# EAGLE board acq07 (EAGLE 9.6.2)
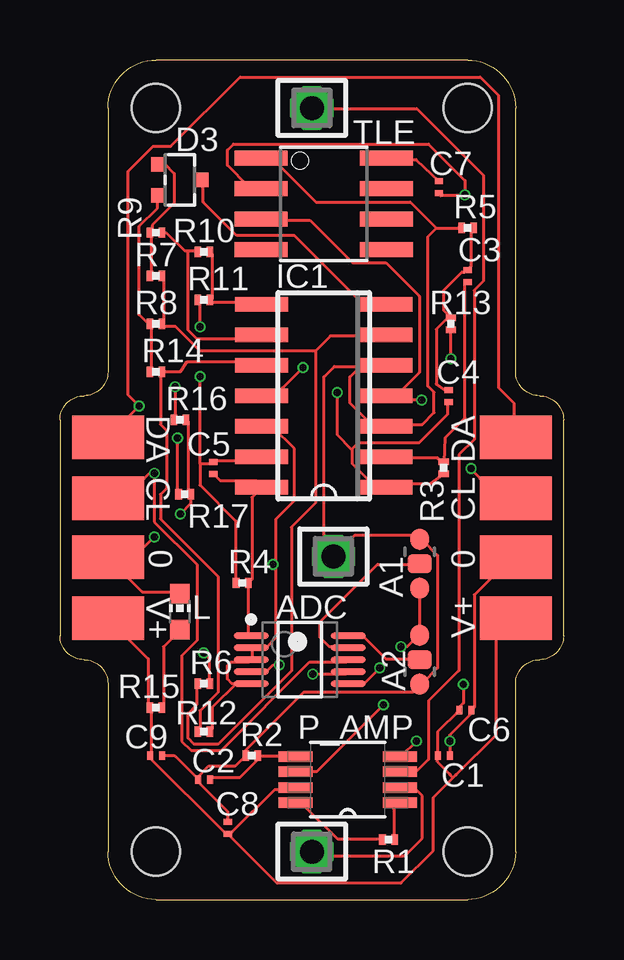
[diagram p0: board, top side]
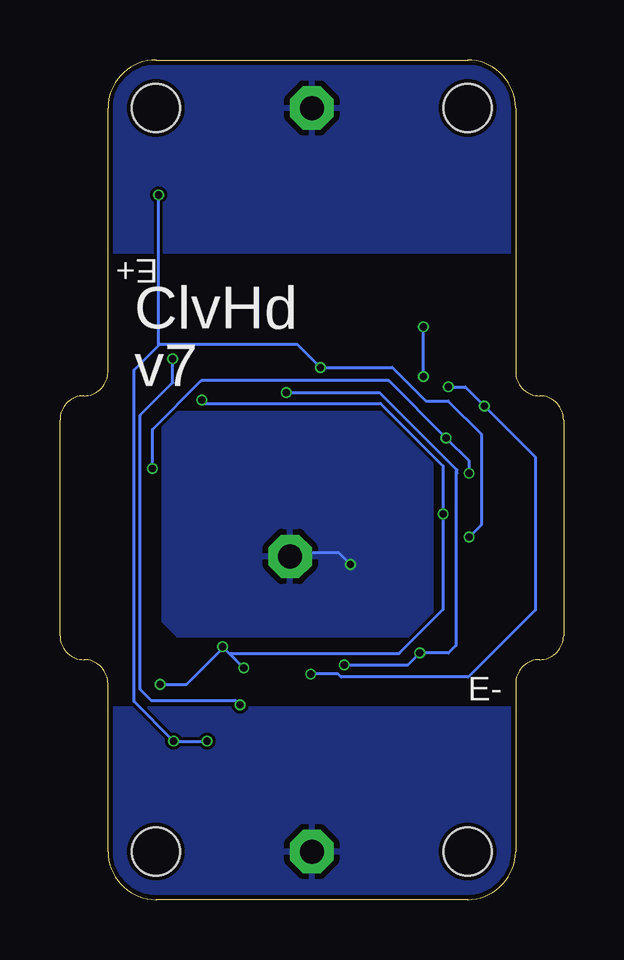
[diagram p1: board, bottom side, seen from below]

Size 21 x 35 mm. Coordinates in mm from the lower left corner, seen from the top.
Outline: 4,0 17,0 arc90 19,2 19,9 arc-90 20,10 arc90 21,11 21,20 arc90 20,21 arc-90 19,22 19,33 arc90 17,35 4,35 arc90 2,33 2,22 arc-90 1,21 arc90 0,20 0,11 arc90 1,10 arc-90 2,9 2,2 arc90 4,0
Copper layers (1*16): Top 0.035mm / dielectric 1.6mm / Bottom 0.035mm
Design rules "jlcpcb-2layers *": minimum track width 5mil, minimum drill 0.3mm, track to track 5mil, track to pad 5mil, pad to pad 5mil, via to via 5mil, smd to smd 5mil, copper to edge 0.2mm, drill to drill 6mil, minimum pad ring 10mil, minimum via ring 3mil, stop-mask expansion 4mil, vias tented up to drill 12mil, thermal gap 10mil
Holes 2 mm at 17,33 17,2 4,2 4,33

## Footprints (pad centres in the part's own frame; a part is rotated, then mirrored left to right if it is on the bottom)
C0R-JMP = smd 0.8 x 0.889: 1 0,1.016; 3 0,-1.016 | smd 1 x 0.8: 2 0,0
MICROCHIP_MCP3427-E-UN_0 = smd 1.45 x 0.25: 1 -2.025,1; 2 -2.025,0.5; 3 -2.025,0; 4 -2.025,-0.5; 5 -2.025,-1; 6 2.025,-1; 7 2.025,-0.5; 8 2.025,0; 9 2.025,0.5; 10 2.025,1
C0201 = smd 0.25 x 0.35: 1 -0.25,0; 2 0.25,0
SOT323 = smd 0.6 x 0.55: 1 -0.65,-0.925; 2 0.65,-0.925; 3 0,0.925
SO14 = smd 0.6 x 2.2: 1 -3.81,-2.6; 2 -2.54,-2.6; 3 -1.27,-2.6; 4 0,-2.6; 5 1.27,-2.6; 6 2.54,-2.6; 7 3.81,-2.6; 8 3.81,2.6; 9 2.54,2.6; 10 1.27,2.6; 11 0,2.6; 12 -1.27,2.6; 13 -2.54,2.6; 14 -3.81,2.6
CHIP-LED0603 = smd 0.8 x 0.8: A 0,-0.75; C 0,0.75
SOP65P490X110-8N = smd 1.422 x 0.432: 1 -2.184,0.965; 2 -2.184,0.33; 3 -2.184,-0.33; 4 -2.184,-0.965; 5 2.184,-0.965; 6 2.184,-0.33; 7 2.184,0.33; 8 2.184,0.965
R0201 = smd 0.28 x 0.43: 1 -0.255,0; 2 0.255,0
SO-8 = smd 0.61 x 2.21: 1 -1.905,-2.616; 2 -0.635,-2.616; 3 0.635,-2.616; 4 1.905,-2.616; 5 1.905,2.616; 6 0.635,2.616; 7 -0.635,2.616; 8 -1.905,2.616
009176002 = smd 1.8 x 3: 1 -1.27,0; 2 1.27,0
SSW-101-02-G-S = drill 1 pad 1.5 octagon: 1 0,0

## Placement (x,y rotation side)
A1  0R-JUMPC  [C0R-JMP]  15,14 0 top
A2  0R-JUMPC  [C0R-JMP]  15,10 180 top
ADC  MICROCHIP_MCP3427-E-UNMICROCHIP_MCP3427-E-UN_0_0  [MICROCHIP_MCP3427-E-UN_0]  10,10 0 top
C1  0.1nF  [C0201]  16,6 0 top
C2  1nF  [C0201]  6,5 0 top
C3  0.1nF  [C0201]  17,26 90 top
C4  0.1nF  [C0201]  16.2,21 90 top
C5  0.1nF  [C0201]  6.4,18 270 top
C6  0.1nF  [C0201]  16.9,7.9 0 top
C7  0.1nF  [C0201]  15.8,29.7 270 top
C8  0.1nF  [C0201]  7,3 270 top
C9  0.1nF  [C0201]  4,6 180 top
D3  HSMS-285C  [SOT323]  5,30 270 top
IC1  LMV324M  [SO14]  11,21 90 top
L  [CHIP-LED0603]  5,12 0 top
P_AMP  INA326EA/250  [SOP65P490X110-8N]  12,5 180 top
R1  100k  [R0201]  13.7,2.5 180 top
R2  100k  [R0201]  8,6 0 top
R3  100k  [R0201]  16,18 270 top
R4  100k  [R0201]  7.6,13.2 0 top
R5  100k  [R0201]  17,28 180 top
R6  100k  [R0201]  6,9 180 top
R7  100k  [R0201]  4,26 180 top
R8  100k  [R0201]  4,24 180 top
R9  100k  [R0201]  4,27.8 0 top
R10  100k  [R0201]  6,27 0 top
R11  100k  [R0201]  6,25 180 top
R12  100k  [R0201]  6,7 180 top
R13  100k  [R0201]  16.3,24 90 top
R14  100k  [R0201]  4,22 180 top
R15  [R0201]  4,8 0 top
R16  100k  [R0201]  5,20 180 top
R17  100k  [R0201]  5.2,16.9 180 top
TLE  TLE2426CD  [SO-8]  11,29 270 top
X1  009176002  [009176002]  19,13 270 top
X2  009176002  [009176002]  19,18 270 top
X3  SSW-101-02-G-S  [SSW-101-02-G-S]  10.5,2 180 top
X4  009176002  [009176002]  2,13 270 top
X5  SSW-101-02-G-S  [SSW-101-02-G-S]  10.5,33 0 top
X6  009176002  [009176002]  2,18 270 top
X7  SSW-101-02-G-S  [SSW-101-02-G-S]  11.4,14.3 0 top

## Library data of the parts
A1 A2 = jump-0r-smd
ADC = UN; CIIVA_IDS: 1029210; COMPONENT_LINK_1_DESCRIPTION: Manufacturer URL; COMPONENT_LINK_1_URL: http://www.microchip.com/; COMPONENT_LINK_3_DESCRIPTION: Package Specification; COMPONENT_LINK_3_URL: http://www.microchip.com/stellent/groups/techpub_sg/documents/packagingspec/en012702.pdf; DATASHEET: http://ww1.microchip.com/downloads/en/DeviceDoc/22226a.pdf; DATASHEET_VERSION: revA, Dec-2009; FOOTPRINT_VARIANT_NAME_0: Level C; FOOTPRINT_VARIANT_NAME_1: Level B; FOOTPRINT_VARIANT_NAME_2: Level A; IMPORTED: yes; IMPORTED_FROM: vault; IMPORT_TS: 1521848675; MF: Microchip; MPN: MCP3427-E/UN; PACKAGE: MSOP-UN10; PACKAGE_DESCRIPTION: 10-Lead Plastic Micro Small Outline Package (UN) [MSOP]; PACKAGE_VERSION: revBB, Aug-2009; PIN_0_0_2_INSIDE_EDGE: clock; PREFIX: U; RELEASE_DATE: 1331949051; VAULT_GUID: A68823D5-815D-456C-A47E-4251F2B2754A; VAULT_REVISION: E4767321-FC88-4F77-9C9C-64A9666F4DA4
C1-C9 = rcl; SPICEPREFIX: C
D3 = avago
IC1 = linear; SPICEPREFIX: J
L = led
P_AMP = INA326EA_250; DESCRIPTION: Precision, Low Drift, CMOS Instrumentation Amplifier 8-VSSOP -40 to 85; DIGI-KEY_PART_NUMBER: 296-15312-1-ND; DIGI-KEY_PURCHASE_URL: https://www.digikey.com/product-detail/en/texas-instruments/INA326EA-250/296-15312-1-ND/568254?utm_source=snapeda&utm_medium=aggregator&utm_campaign=symbol; MF: Texas Instruments; MP: INA326EA/250; PACKAGE: MSOP-8 Texas Instruments
R1-R17 = rcl; SPICEPREFIX: R
TLE = tle2426
X1 X2 X4 X6 = con-avxPerso; MPN: 009176002001006; OC_FARNELL: 1582834; OC_NEWARK: 66M1960
X3 X5 X7 = con-samtec; MF: Samtec Inc.; MPN: SSW-101-02-G-S; OC_FARNELL: unknown; OC_NEWARK: 11P9336

## Nets
GNDA: A1.1 A2.1 ADC.2 ADC.3 ADC.5 C2.1 C8.1 C9.1 IC1.3 IC1.5 IC1.12 R2.1 R5.2 R12.1 TLE.1 X7.1
INM: P_AMP.2 X3.1
INP: P_AMP.3 X5.1
N$1: P_AMP.1 R1.1
N$2: P_AMP.8 R1.2
N$4: C2.2 P_AMP.5 R2.2
N$6: C3.1 IC1.2 R3.1
N$7: C3.2 C4.2 R5.1 R13.2
N$8: C5.1 IC1.13 R4.1 R11.2
N$9: P_AMP.6 R13.1
N$10: IC1.6 R6.2 R7.1 R8.1
N$11: D3.2 R8.2 R14.2
N$12: IC1.9 R9.2 R10.1
N$13: D3.3 IC1.7
N$14: D3.1 R7.2 R9.1
N$15: IC1.8 R10.2 R11.1
N$16: ADC.1 C5.2 IC1.14 R4.2
N$17: ADC.7 R16.2 X2.1 X6.1
N$18: IC1.10 R12.2 R14.1
N$23: ADC.4 C4.1 IC1.1 R3.2 R6.1
N$54: L.A R15.2
N$55: C7.1 TLE.8
N$56: ADC.8 R17.2 X2.2 X6.2
N$57: A1.2 ADC.9
N$58: A2.2 ADC.10
V+: A1.3 A2.3 ADC.6 C1.1 C6.1 C8.2 C9.2 IC1.4 P_AMP.7 R15.1 R16.1 R17.1 TLE.3 X1.2 X4.2
V-: C1.2 C6.2 C7.2 IC1.11 L.C P_AMP.4 TLE.2 X1.1 X4.1

## Tracks (layer width: path | path; a pad name or v marks a point on that pad's centre or on a via)
GNDA  (via drill 0.3)
  Top 0.127: C9.1 4.75,6 4.82,5.97 5.71,5.08 | C8.1 6.99,3.3 6.99,3.68 5.71,4.95 C2.1 5.71,5.08 | 5.71,5.08 6.2,5.57 7.31,5.57 R2.1 7.75,6.1 7.75,6.22 10.16,8.64 14.73,8.64 14.99,8.89 A2.1 15.11,9.02 15.75,9.65 15.75,14.35 15.11,14.99 A1.1 14.83,15.19 12.29,15.19 X7.1 11,15.23 11,21.79 11.44,22.23 13.59,22.23 IC1.5 12.57,22.27 12.09,21.79 12.09,20.7 12.81,19.99 12.95,19.94 | R12.1 6.35,7.11 6.35,8 7.37,9.02 ADC.5 7.17,9 6.99,9.19 6.99,9.75 7.14,9.91 7.87,9.91 ADC.3 8,10.03 8,10.41 ADC.2 8,10.54 8.64,10.54 9.02,10.92 9.02,13.97 | 9.02,13.97 9.02,15.88 9.78,16.64 9.78,18.8 8.89,19.68 8.51,19.68 IC1.12 | 15.69,28 14.61,29.08 10.67,29.08 8.89,30.86 8.51,30.86 TLE.1 | 15.69,28 15.7,27.99 15.34,27.63 15.34,21.4 15.59,21.15 15.59,20.29 15.11,19.81 13.72,19.81 IC1.3 | 16.64,28.07 R5.2 15.69,28 | 12.95,19.94 13.08,19.81 13.59,19.81 IC1.3 | 12.95,19.94 IC1.3 | v8.89,13.97 9.02,13.97
  Bottom 0.127: X7.1 11.23,14.47 9.39,14.47 v8.89,13.97
  pour Bottom: 5.5,20.3 5.5,11 16.09,11 16.7,11.6 16.7,20.3
INM
  Top 0.127: P_AMP.2 14.22,4.57 14.86,4.57 15.11,4.32 15.11,2.56 14.38,1.82 10.62,1.82 10.54,1.91 X3.1
  pour Bottom: 0,-1 21,-1 21,8 0,8
INP
  Top 0.127: P_AMP.3 14.22,5.33 14.86,5.33 15.37,5.84 15.37,8.28 16.64,9.55 16.64,18.54 17.27,19.18 17.27,25.4 17.65,25.78 17.65,30.21 14.88,32.98 10.51,32.98 X5.1
  pour Bottom: 0,36 21,36 21,27 0,27
N$1
  Top 0.127: P_AMP.1 13.92,3.77 13.92,2.53 R1.1
N$2
  Top 0.127: R1.2 13.42,2.53 11.56,2.53 10.16,3.94 9.91,3.94 P_AMP.8
N$4
  Top 0.127: 8.26,5.97 8.26,5.84 7.49,5.08 6.35,5.08 C2.2 | 8.26,5.97 9.78,5.97 P_AMP.5 | 8.26,5.97 R2.2
N$6
  Top 0.127: C3.1 16.89,25.65 16.89,20.08 16.06,19.25 R3.1 15.88,18.29 15.75,18.41 13.72,18.41 IC1.2
N$7
  Top 0.127: R5.1 17.14,27.94 17.14,26.39 C3.2 16.89,26.16 16.76,26.16 16,25.4 16,24.55 R13.2 16.18,24.26 15.69,23.78 15.69,21.5 16.05,21.25 C4.2
N$8  (via drill 0.3)
  Top 0.127: C5.1 6.5,18.29 8.26,18.29 8.38,18.41 IC1.13 | 5.84,18.16 5.84,17.27 7.34,15.77 R4.1 | 6.24,18.16 6.37,18.16 C5.1 | 6.24,18.16 5.84,18.16 | v5.84,23.88 5.84,24.89 R11.2 | 5.84,18.16 v5.84,21.8 | 6.24,18.16 C5.1
  Bottom 0.127: v5.84,21.8 v5.84,23.88
N$9  (via drill 0.3)
  Top 0.127: v13.49,8.11 10.71,5.33 9.91,5.33 P_AMP.6 | v16.3,22.54 R13.1
  Bottom 0.127: v16.3,22.54 16.3,21.54 17.65,20.19 17.65,8.76 17.2,8.31 13.69,8.31 v13.49,8.11
N$10
  Top 0.127: R7.1 4.32,25.91 4.32,24 R8.1 4.32,23.88 4.83,23.88 5.84,22.86 10.65,22.86 | 10.65,22.86 11.28,23.5 13.59,23.5 IC1.6 | 10.65,22.86 10.65,16.53 9.65,15.53 9.65,9.53 6.6,6.48 5.59,6.48 5.33,6.73 5.33,7.75 5.71,8.13 5.71,8.89 R6.2
N$11
  Top 0.127: R14.2 3.81,22.1 3.81,23.88 R8.2 3.68,24 3.3,24.38 3.3,28.07 4.06,28.83 4.06,29.34 D3.2
N$12
  Top 0.127: 5.33,27.05 5.21,27.05 4.42,27.8 R9.2 | 5.33,27.05 5.71,27.05 R10.1 | 5.33,27.05 5.33,23.75 5.71,23.37 8.26,23.37 8.38,23.5 IC1.9
N$13
  Top 0.127: D3.3 5.97,29.97 5.97,29.08 7.37,27.69 9.78,27.69 12.57,24.89 13.59,24.89 IC1.7
N$14
  Top 0.127: R7.2 3.81,26.04 3.81,27.74 R9.1 3.85,27.9 3.85,28.11 4.76,29.03 4.76,30.26 4.38,30.65 D3.1
N$15
  Top 0.127: R10.2 6.35,26.92 6.35,25.02 R11.1 6.35,24.89 8.38,24.89 IC1.8
N$16
  Top 0.127: ADC.1 7.87,11.05 7.87,11.06 7.87,13.2 R4.2 7.97,13.31 8,13.34 8,16.76 8.38,17.14 IC1.14 8.38,17.27 8.2,17.45 6.69,17.45 C5.2
N$17  (via drill 0.3)
  Top 0.127: v4.8,21.37 4.8,20.05 R16.2 | X6.1 2.03,19.3 v3.3,20.57 2.85,21.03 2.85,30.36 3.88,31.4 4.62,31.4 7.51,34.29 17.53,34.29 18.29,33.53 18.29,21.34 18.92,20.7 18.92,19.3 X2.1 | v10.54,9.4 11.94,9.4 ADC.7
  Bottom 0.127: v4.8,21.37 4.1,21.37 v3.3,20.57 1.18,18.45 1.18,12.06 3.97,9.27 9.27,9.27 9.4,9.4 v10.54,9.4
N$18
  Top 0.127: IC1.10 8.27,22.4 5.28,22.4 5.02,22 R14.1 4.19,21.97 4.19,19.81 4.45,19.56 4.45,17.14 4.19,16.89 4.19,15.88 6.6,13.46 6.6,8.64 5.84,7.87 5.84,7.11 R12.2
N$23  (via drill 0.3)
  Top 0.127: v6,10.28 6.22,10.05 6.22,9.02 R6.1 | v9.14,9.78 8.89,9.78 8.64,9.53 8,9.53 ADC.4 | 12.19,18.8 12.45,19.05 14.99,19.05 16.18,20.24 16.18,20.74 C4.1 | 12.19,18.8 12.19,18.16 13.08,17.27 13.59,17.27 IC1.1 13.72,17.27 13.8,17.35 15.47,17.35 R3.2 | 12.19,18.8 12.16,18.77 11.56,19.37 v11.56,21.13
  Bottom 0.127: v9.14,9.78 6.5,9.78 v6,10.28 4.8,10.28 4.49,10.59 4.49,17.78 | 4.49,17.86 4.49,17.78 | v11.56,21.13 7.67,21.13 4.45,17.91 4.45,17.78 4.49,17.78
N$54
  Top 0.127: R15.2 4.32,8 4.32,10.54 4.95,11.18 L.A
N$55
  Top 0.127: C7.1 14.84,30.85 13.72,30.85 13.72,30.86 TLE.8
N$56  (via drill 0.3)
  Top 0.127: X6.2 2.7,16.73 3.74,17.77 v3.94,17.77 3.94,15.75 5.71,13.97 5.71,10.79 5.08,10.16 5.08,6.6 5.46,6.22 6.73,6.22 10.41,9.91 11.94,9.91 ADC.8 | v17.14,17.96 17.78,17.27 X2.2 | v4.9,19.24 4.88,19.22 4.88,17 R17.2
  Bottom 0.127: v3.94,17.77 3.94,18.27 v4.9,19.24 7.29,21.63 15.11,21.63 17.14,19.6 v17.14,17.96
N$57
  Top 0.127: A1.2 14.99,13.97 13.24,13.97 10.85,11.58 10.85,10.92 11.23,10.54 11.94,10.54 ADC.9
N$58
  Top 0.127: A2.2 14.99,10.03 13.59,10.03 12.7,10.92 12.06,10.92 ADC.10
V+  (via drill 0.3)
  Top 0.127: 14.1,21.08 13.72,21.08 IC1.4 14.1,21.08 | 14.1,21.08 14.99,21.97 14.99,25.15 13.59,26.54 12.2,26.54 10.43,28.32 8.51,28.32 TLE.3 | 14.99,11.05 14.99,12.95 A1.3 | v13.34,9.65 12.7,9.02 12.06,9.02 ADC.6 | v14.22,10.54 14.48,10.54 14.99,11.05 | 14.99,11.05 A2.3 | 5.47,16.88 R17.1 | 14.1,21.08 14.36,20.82 v15.09,20.82 | 16.54,7.77 C6.1 16.65,8 16.64,8 | 16.27,5.22 15.75,5.74 15.75,5.97 C1.1 15.75,6.1 15.75,6.99 16.63,7.87 16.63,8 16.64,8 | 16.27,5.22 16.3,5.19 | 16.52,5.2 18.17,6.85 18.17,10.93 18.92,11.68 X1.2 | 16.52,5.2 16.51,5.19 | 7.17,2.79 7.11,2.79 C8.2 6.99,2.79 6.86,2.79 3.68,5.97 C9.2 3.81,6.1 3.81,7.87 R15.1 3.68,8 3.68,10.03 2.03,11.68 X4.2 | 7.17,2.79 8.94,4.57 9.78,4.57 P_AMP.7 | 7.17,2.79 7.05,2.67 9.03,0.69 14.22,0.69 15.57,2.03 15.57,4.26 16.39,5.08 | 16.39,5.08 16.4,5.09 | v16.83,8.97 16.83,8.19 16.64,8 | R17.1 5.46,16.51 v5.02,16.07 | R17.1 5.33,17.08 5.33,19.94 R16.1 | 16.38,5.08 16.26,5.21 16.27,5.22 | 16.38,5.08 16.51,5.21 16.52,5.2 | 16.38,5.08 16.39,5.08
  Bottom 0.127: v15.09,20.82 14.94,20.68 7.63,20.68 5.02,18.07 v5.02,16.07 5.02,12.09 6.86,10.25 13.94,10.25 v13.34,9.65 v14.22,10.54 14.22,10.48 15.73,8.97 v16.83,8.97
V-  (via drill 0.3)
  Top 0.127: 15.37,31.5 7.24,31.5 6.99,31.24 6.99,30.61 7.87,29.72 8.38,29.72 TLE.2 | 15.37,31.5 15.38,31.5 | 2.54,13.72 2.03,14.22 X4.1 2.54,13.72 | 2.54,13.72 3.43,12.83 4.95,12.83 L.C | C1.2 16.26,6.1 v16.26,6.6 16.26,6.86 17.17,7.77 C6.2 17.25,8 17.27,8 17.27,12.7 18.92,14.35 X1.1 | v14.86,6.6 14.22,5.97 P_AMP.4 | v10.14,22.18 9.34,21.38 8.83,21 IC1.11 | v3.94,15.11 2.54,13.72 | C7.2 15.88,29.34 16.89,29.34 v16.89,29.38 16.89,29.97 15.37,31.5
  Bottom 0.127: v14.86,6.6 v16.26,6.6 17.91,8.26 17.91,22.07 16.88,23.1 16.89,23.11 16.89,23.15 | 16.89,23.15 11.11,23.15 v10.14,22.18 7.14,22.18 5.75,20.79 4.82,20.79 3.43,19.4 3.43,15.62 v3.94,15.11 | 16.89,23.15 v16.89,29.38

## Text on the board
tNames: DA | CL | DA | CL | 0 | 0 | V+ | V+
bNames: E+ | ClvHd | v7 | E-